# EAGLE board CT_schematic (EAGLE 7.6.0)

Size 100 x 80 mm. Coordinates in mm from the lower left corner, seen from the top.
Outline: 0,0 100,0 100,80 0,80 0,0
Copper layers (1*16): Top 0.035mm / dielectric 1.5mm / Bottom 0.035mm
Design rules "default": minimum track width 10mil, minimum drill 24mil, track to track 8mil, track to pad 8mil, pad to pad 8mil, via to via 8mil, smd to smd 8mil, copper to edge 40mil, drill to drill 8mil, minimum pad ring 10mil, minimum via ring 8mil, stop-mask expansion 4mil, vias tented up to drill 0mil, thermal gap 10mil

## Footprints (pad centres in the part's own frame; a part is rotated, then mirrored left to right if it is on the bottom)
C0603 = smd 0.8 x 0.8: 1 -0.762,0; 2 0.762,0
C0402 = smd 0.5 x 0.5: 1 -0.508,0; 2 0.508,0
C0805 = smd 1.2 x 1.3: 1 -1.016,0; 2 1.016,0
C1206 = smd 1.3 x 1.6: 1 -1.524,0; 2 1.524,0
C1210 = smd 1.2 x 2.5: 1 -1.524,0; 2 1.524,0
EXV-9H = smd 3.505 x 1.676: 1 -2.857,0; 2 2.857,0
L0603 = smd 0.8 x 0.8: 1 -0.762,0; 2 0.762,0
PJ-037B_PACKAGE = drill 3.7 square: 1 12,0 | drill 3.2 square: 2 6,0
R0603 = smd 0.8 x 0.8: 1 -0.762,0; 2 0.762,0
LQFP64 = smd 0.3 x 1.2: 1 -3.75,-5.75; 2 -3.25,-5.75; 3 -2.75,-5.75; 4 -2.25,-5.75; 5 -1.75,-5.75; 6 -1.25,-5.75; 7 -0.75,-5.75; 8 -0.25,-5.75; 9 0.25,-5.75; 10 0.75,-5.75; 11 1.25,-5.75; 12 1.75,-5.75; 13 2.25,-5.75; 14 2.75,-5.75; 15 3.25,-5.75; 16 3.75,-5.75; 33 3.75,5.75; 34 3.25,5.75; 35 2.75,5.75; 36 2.25,5.75; 37 1.75,5.75; 38 1.25,5.75; 39 0.75,5.75; 40 0.25,5.75; 41 -0.25,5.75; 42 -0.75,5.75; 43 -1.25,5.75; 44 -1.75,5.75; 45 -2.25,5.75; 46 -2.75,5.75; 47 -3.25,5.75; 48 -3.75,5.75 | smd 1.2 x 0.3: 17 5.75,-3.75; 18 5.75,-3.25; 19 5.75,-2.75; 20 5.75,-2.25; 21 5.75,-1.75; 22 5.75,-1.25; 23 5.75,-0.75; 24 5.75,-0.25; 25 5.75,0.25; 26 5.75,0.75; 27 5.75,1.25; 28 5.75,1.75; 29 5.75,2.25; 30 5.75,2.75; 31 5.75,3.25; 32 5.75,3.75; 49 -5.75,3.75; 50 -5.75,3.25; 51 -5.75,2.75; 52 -5.75,2.25; 53 -5.75,1.75; 54 -5.75,1.25; 55 -5.75,0.75; 56 -5.75,0.25; 57 -5.75,-0.25; 58 -5.75,-0.75; 59 -5.75,-1.25; 60 -5.75,-1.75; 61 -5.75,-2.25; 62 -5.75,-2.75; 63 -5.75,-3.25; 64 -5.75,-3.75
WSON-6 = smd 0.4 x 0.6: 1 -1,-1.4; 2 0,-1.4; 3 1,-1.4; 4 1,1.4; 5 0,1.4; 6 -1,1.4 | drill 0.2 pad 0.3: P$1 0.95,0; P$2 -0.95,0; P$3 0,-0.5; P$4 0,0.5 | smd 2.4 x 1.5: PAD 0,0
MICRO_USB_AB = smd 0.4 x 1.35: 1 1.3,0.26; 2 0.65,0.26; 3 0,0.26; 4 -0.65,0.26; 5 -1.3,0.26 | drill 0.6 pad 0.95 long: 6 4.175,-2.54; 7 -4.175,-2.54 | drill 0.7 pad 1.1 long: 8 -2.225,0.46; 9 2.225,0.46
SOT143B = smd 1 x 0.7: 1 -0.75,-1 | smd 0.6 x 0.7: 2 0.95,-1; 3 0.95,1; 4 -0.95,1
XB24CZ7UIS-004 = smd 2.84 x 1.52: 1 -10,6; 2 -10,4; 3 -10,2; 4 -10,0; 5 -10,-2; 6 -10,-4; 7 -10,-6; 8 -10,-8; 9 -10,-10; 10 -10,-12; 11 -10,-14; 12 -10,-16; 13 -10,-18; 21 10,-18; 22 10,-16; 23 10,-14; 24 10,-12; 25 10,-10; 26 10,-8; 27 10,-6; 28 10,-4; 29 10,-2; 30 10,0; 31 10,2; 32 10,4; 33 10,6; 34 10,8; 35 10,10; 36 10,12; 37 10,14 | smd 1.52 x 2.84: 14 -6,-19.68; 15 -4,-19.68; 16 -2,-19.68; 17 0,-19.68; 18 2,-19.68; 19 4,-19.68; 20 6,-19.68
ASEK = smd 1.4 x 1: 1 -1.1,-0.8; 2 1.1,-0.8; 3 1.1,0.8; 4 -1.1,0.8
ASFL1 = smd 1.7 x 1.5: 1 -1.27,-1.1; 2 1.27,-1.1; 3 1.27,1.1; 4 -1.27,1.1
WSON-8 = smd 0.3 x 0.6: 1 -0.75,0; 2 0.05,0; 3 0.85,0; 4 1.65,0; 5 1.65,3.8; 6 0.85,3.8; 7 0.05,3.8; 8 -0.75,3.8 | smd 3 x 2.6: PAD 0.45,1.9
SON-6 = smd 0.55 x 0.3: 1 -0.355,0.5 | smd 0.52 x 0.3: 2 -0.37,0; 3 -0.37,-0.5; 4 0.37,-0.5; 5 0.37,0; 6 0.37,0.5
SW_4-1437565-2 = smd 1.4 x 2.1: 1 -2.23,4.55; 2 -2.23,-4.55; 3 2.23,4.55; 4 2.23,-4.55
LGM67K-G1J2-24-Z = smd 0.8 x 1.4: A -2,0; C 0,0
NC7SZ125M5X = smd 1.3 x 0.7: 1 -1.3,0.95; 2 -1.3,0; 3 -1.3,-0.95; 4 1.3,-0.95; 5 1.3,0.95

## Placement (x,y rotation side)
C1  1e-07  [C0603]  -46.99,71.12 0 top  (outside the outline)
C2  1e-07  [C0603]  -50.8,71.12 0 top  (outside the outline)
C3  1e-07  [C0603]  -54.61,71.12 0 top  (outside the outline)
C4  1e-07  [C0603]  -58.42,71.12 0 top  (outside the outline)
C5  4.7e-06  [C0603]  -39.37,71.12 0 top  (outside the outline)
C6  1e-07  [C0603]  -62.23,71.12 0 top  (outside the outline)
C7  1e-08  [C0603]  -66.04,71.12 0 top  (outside the outline)
C8  1e-06  [C0603]  -69.85,71.12 0 top  (outside the outline)
C9  1e-08  [C0402]  -54.61,76.2 0 top  (outside the outline)
C10  1e-05  [C0805]  -63.5,63.5 0 top  (outside the outline)
C11  1e-07  [C0402]  -58.42,76.2 0 top  (outside the outline)
C12  4.7e-11  [C0402]  -50.8,76.2 0 top  (outside the outline)
C13  8.2e-12  [C0603]  -43.18,71.12 0 top  (outside the outline)
C14  1e-08  [C0402]  -62.23,76.2 0 top  (outside the outline)
C15  1e-08  [C0402]  -66.04,76.2 0 top  (outside the outline)
C16  1e-08  [C0402]  -69.85,76.2 0 top  (outside the outline)
C17  1e-05  [C1206]  -45.72,63.5 0 top  (outside the outline)
C18  1e-05  [C1210]  -39.37,63.5 0 top  (outside the outline)
C19  1e-07  [C0402]  -15.24,81.28 0 top  (outside the outline)
C20  0.0001  [EXV-9H]  -62.23,55.88 0 top  (outside the outline)
C21  0.0001  [EXV-9H]  -17.78,64.77 0 top  (outside the outline)
C22  1e-08  [C0402]  -19.05,81.28 0 top  (outside the outline)
C23  1e-08  [C0402]  -22.86,81.28 0 top  (outside the outline)
F1  240.0  [L0603]  -15.24,76.2 0 top  (outside the outline)
J1  PJ-037B  [PJ-037B_PACKAGE]  -53.34,7.62 0 top  (outside the outline)
R2  1000.0  [R0603]  -19.05,76.2 0 top  (outside the outline)
R4  4700.0  [R0603]  -22.86,76.2 0 top  (outside the outline)
R5  4700.0  [R0603]  -26.67,76.2 0 top  (outside the outline)
R6  2200.0  [R0603]  -30.48,76.2 0 top  (outside the outline)
R7  2200.0  [R0603]  -34.29,76.2 0 top  (outside the outline)
R8  10000.0  [R0603]  -25.4,71.12 0 top  (outside the outline)
R9  100000.0  [R0603]  -68.58,62.23 0 top  (outside the outline)
R10  2231.0  [R0603]  -38.1,76.2 0 top  (outside the outline)
R11  1000.0  [R0603]  -41.91,76.2 0 top  (outside the outline)
R12  10000.0  [R0603]  -30.48,71.12 0 top  (outside the outline)
R13  10000.0  [R0603]  -35.56,71.12 0 top  (outside the outline)
R14  9100.0  [R0603]  -45.72,76.2 0 top  (outside the outline)
R15  680000.0  [R0603]  -15.24,71.12 0 top  (outside the outline)
R16  120000.0  [R0603]  -20.32,71.12 0 top  (outside the outline)
U1  STM32L100RBT6  [LQFP64]  -66.04,7.62 0 top  (outside the outline)
U2  HDC1080DMBR  [WSON-6]  -33.02,55.88 0 top  (outside the outline)
U3  47590-0001  [MICRO_USB_AB]  -20.32,46.99 0 top  (outside the outline)
U4  prtr5v0u2ax  [SOT143B]  -35.56,81.28 0 top  (outside the outline)
U5  XB24CZ7UIS-004  [XB24CZ7UIS-004]  -25.4,21.59 0 top  (outside the outline)
U6  ASEK-32.768KHz-ECST  [ASEK]  -53.34,55.88 0 top  (outside the outline)
U7  ASFL1-25MHZ-NCS  [ASFL1]  -26.67,55.88 0 top  (outside the outline)
U8  LP3878SDX-ADJ/NOPB  [WSON-8]  -62.23,41.91 0 top  (outside the outline)
U9  TPS3895ADRYR  [SON-6]  -39.37,80.01 0 top  (outside the outline)
U10  4-1437565-2  [SW_4-1437565-2]  -40.64,45.72 0 top  (outside the outline)
U11  Q65110A2395  [LGM67K-G1J2-24-Z]  -27.94,63.5 0 top  (outside the outline)
U12  nc7sz125m5x  [NC7SZ125M5X]  -50.8,62.23 0 top  (outside the outline)
U13  nc7sz125m5x  [NC7SZ125M5X]  -57.15,62.23 0 top  (outside the outline)

## Library data of the parts
C1-C23 F1 J1 R2 R4-R16 U1-U13 = circuit_tree

## Nets
CLK_U1_3: U1.3 U6.3
CLK_U1_5: U1.5 U7.3
GND: C1.2 C2.2 C3.2 C4.2 C5.2 C6.2 C7.2 C8.2 C9.2 C10.2 C11.2 C12.2 C13.2 C14.2 C15.2 C16.2 C17.2 C18.2 C19.2 C20.2 C21.2 C22.2 C23.2 J1.2 R2.2 R8.2 R11.2 R14.2 R16.2 U1.12 U1.18 U1.31 U1.47 U1.63 U2.2 U2.PAD U3.5 U3.6 U3.7 U3.8 U3.9 U4.1 U5.1 U5.11 U5.13 U5.22 U5.35 U6.2 U7.2 U8.3 U8.PAD U9.2 U11.C U12.1 U12.3 U13.1 U13.3
NET_U1_1: C6.1 U1.1
NET_U1_7: R5.1 U1.7 U13.4
NET_U1_13: C7.1 C8.1 F1.1 U1.13
NET_U1_58: R6.1 U1.58 U2.6
NET_U1_59: R7.1 U1.59 U2.1
NET_U1_60: R8.1 U1.60
NET_U1_61: U11.A
NET_U1_62: U10.3 U10.4
NET_U4_4: U3.1 U4.4
NET_U5_6: R4.1 U5.6 U12.4
NET_U8_1: C16.1 U8.1
NET_U8_6: R10.2 R11.1 U8.6
NET_U8_8: R9.1 U8.8
NET_U9_1: R13.1 R14.1 U9.1
NET_U9_3: R15.2 R16.1 U9.3
NET_U9_4: R12.1 U9.4 U12.2 U13.2
NET_U10_1: R2.1 U10.1 U10.2
PROC_SPI1_MISO: U1.22 U5.17
PROC_SPI1_MOSI: U1.23 U5.16
PROC_SPI1_NSS: U1.20 U5.15
PROC_SPI1_SCK: U1.21 U5.14
PROC_USB_DM: U1.44 U3.2 U4.3
PROC_USB_DP: U1.45 U3.3 U4.2
VCC_S1_5V9: C17.1 C20.1 C21.1 J1.1 R9.2 U8.4
VCC_TIER1_3V3: C1.1 C2.1 C3.1 C4.1 C5.1 C9.1 C10.1 C11.1 C12.1 C13.1 C14.1 C15.1 C18.1 C19.1 C22.1 C23.1 F1.2 R4.2 R5.2 R6.2 R7.2 R10.1 R12.2 R13.2 R15.1 U1.19 U1.32 U1.48 U1.64 U2.5 U5.2 U5.27 U6.4 U7.4 U8.5 U9.6 U12.5 U13.5

## Tracks (layer width: path | path; a pad name or v marks a point on that pad's centre or on a via)
CLK_U1_3  (1 unrouted)
CLK_U1_5  (1 unrouted)
GND  (56 unrouted)
NET_U1_1  (1 unrouted)
NET_U1_7  (2 unrouted)
NET_U1_13  (3 unrouted)
NET_U1_58  (2 unrouted)
NET_U1_59  (2 unrouted)
NET_U1_60  (1 unrouted)
NET_U1_62  (1 unrouted)
NET_U4_4  (1 unrouted)
NET_U5_6  (2 unrouted)
NET_U8_1  (1 unrouted)
NET_U8_6  (2 unrouted)
NET_U8_8  (1 unrouted)
NET_U9_1  (2 unrouted)
NET_U9_3  (2 unrouted)
NET_U9_4  (3 unrouted)
NET_U10_1  (2 unrouted)
PROC_SPI1_MISO  (1 unrouted)
PROC_SPI1_MOSI  (1 unrouted)
PROC_SPI1_NSS  (1 unrouted)
PROC_SPI1_SCK  (1 unrouted)
PROC_USB_DM  (2 unrouted)
PROC_USB_DP  (2 unrouted)
VCC_S1_5V9  (5 unrouted)
VCC_TIER1_3V3  (37 unrouted)